# Altium PCB Power_Supply.PcbDoc
Units mil, origin at the board's own origin, x right, y up, seen from the top; angles counter-clockwise.
Board outline 6000 x 4000 mil, 2 copper layers (Top Layer, Bottom Layer); 16 components, 5 nets, 49 pads, 0 vias.
Unrouted connection lines stored in the file: 4.
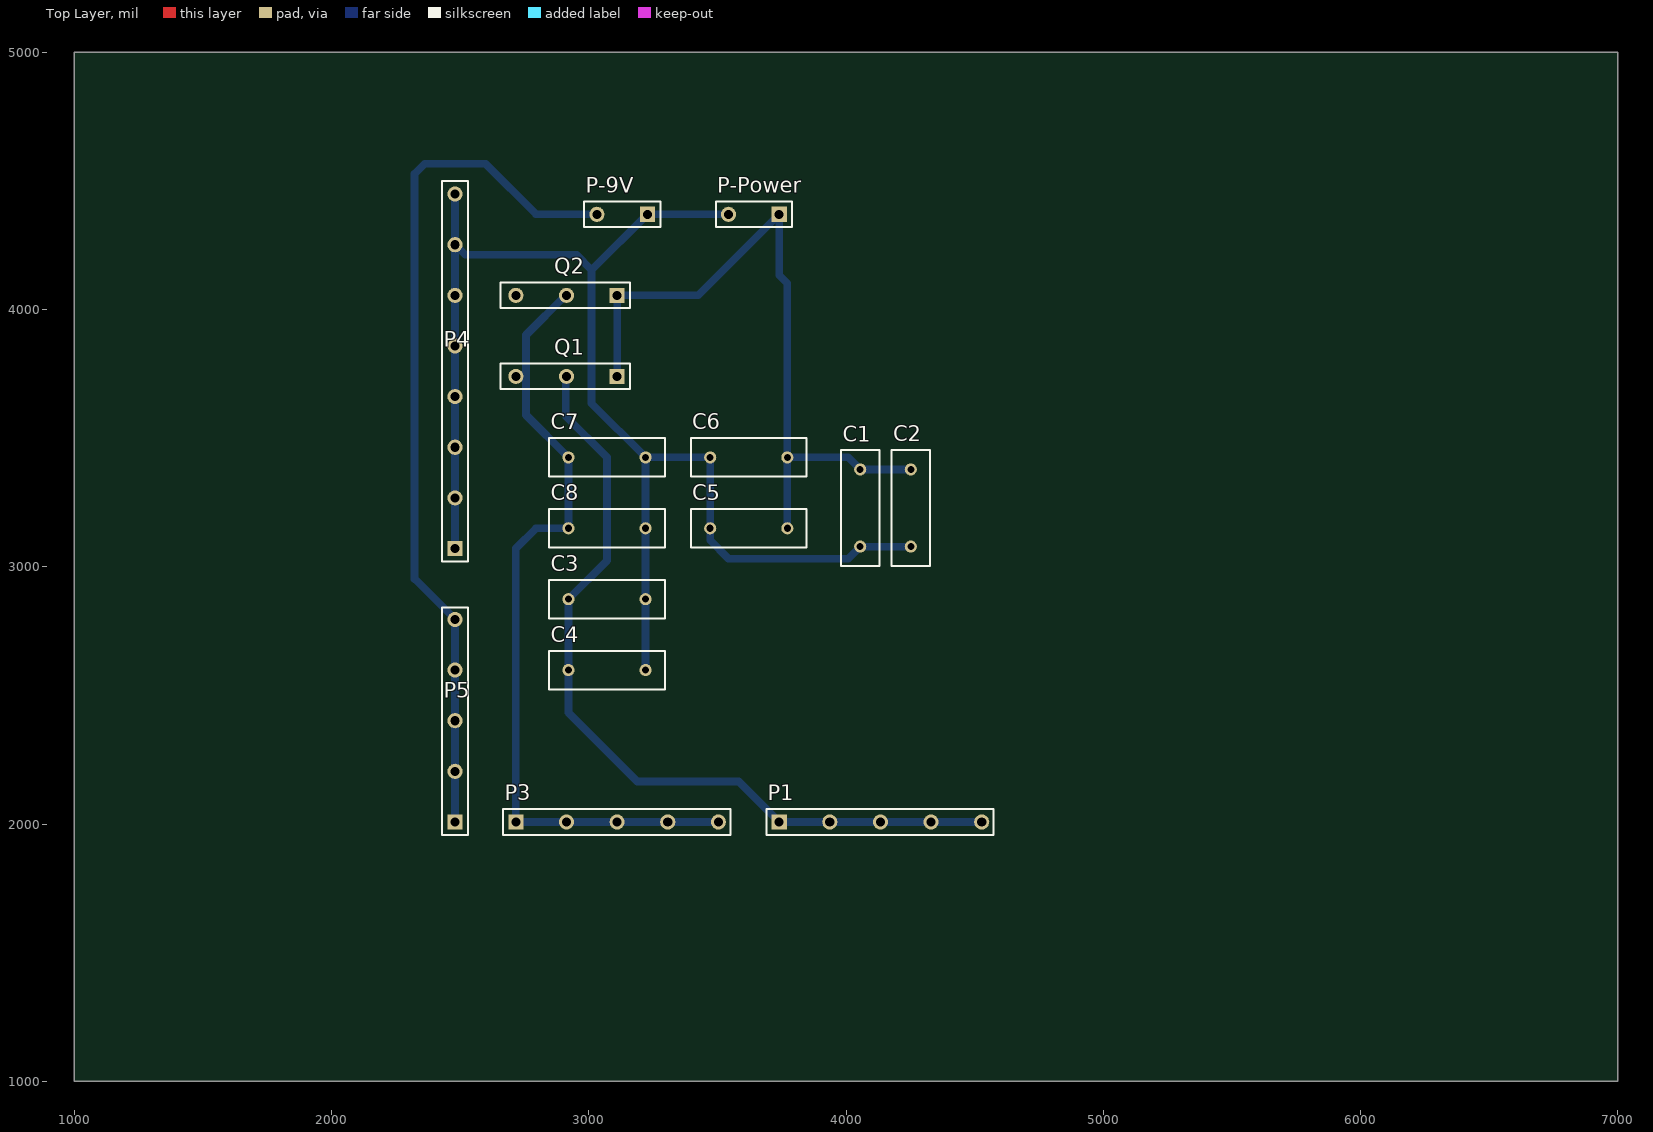
[diagram p0: Top Layer view]
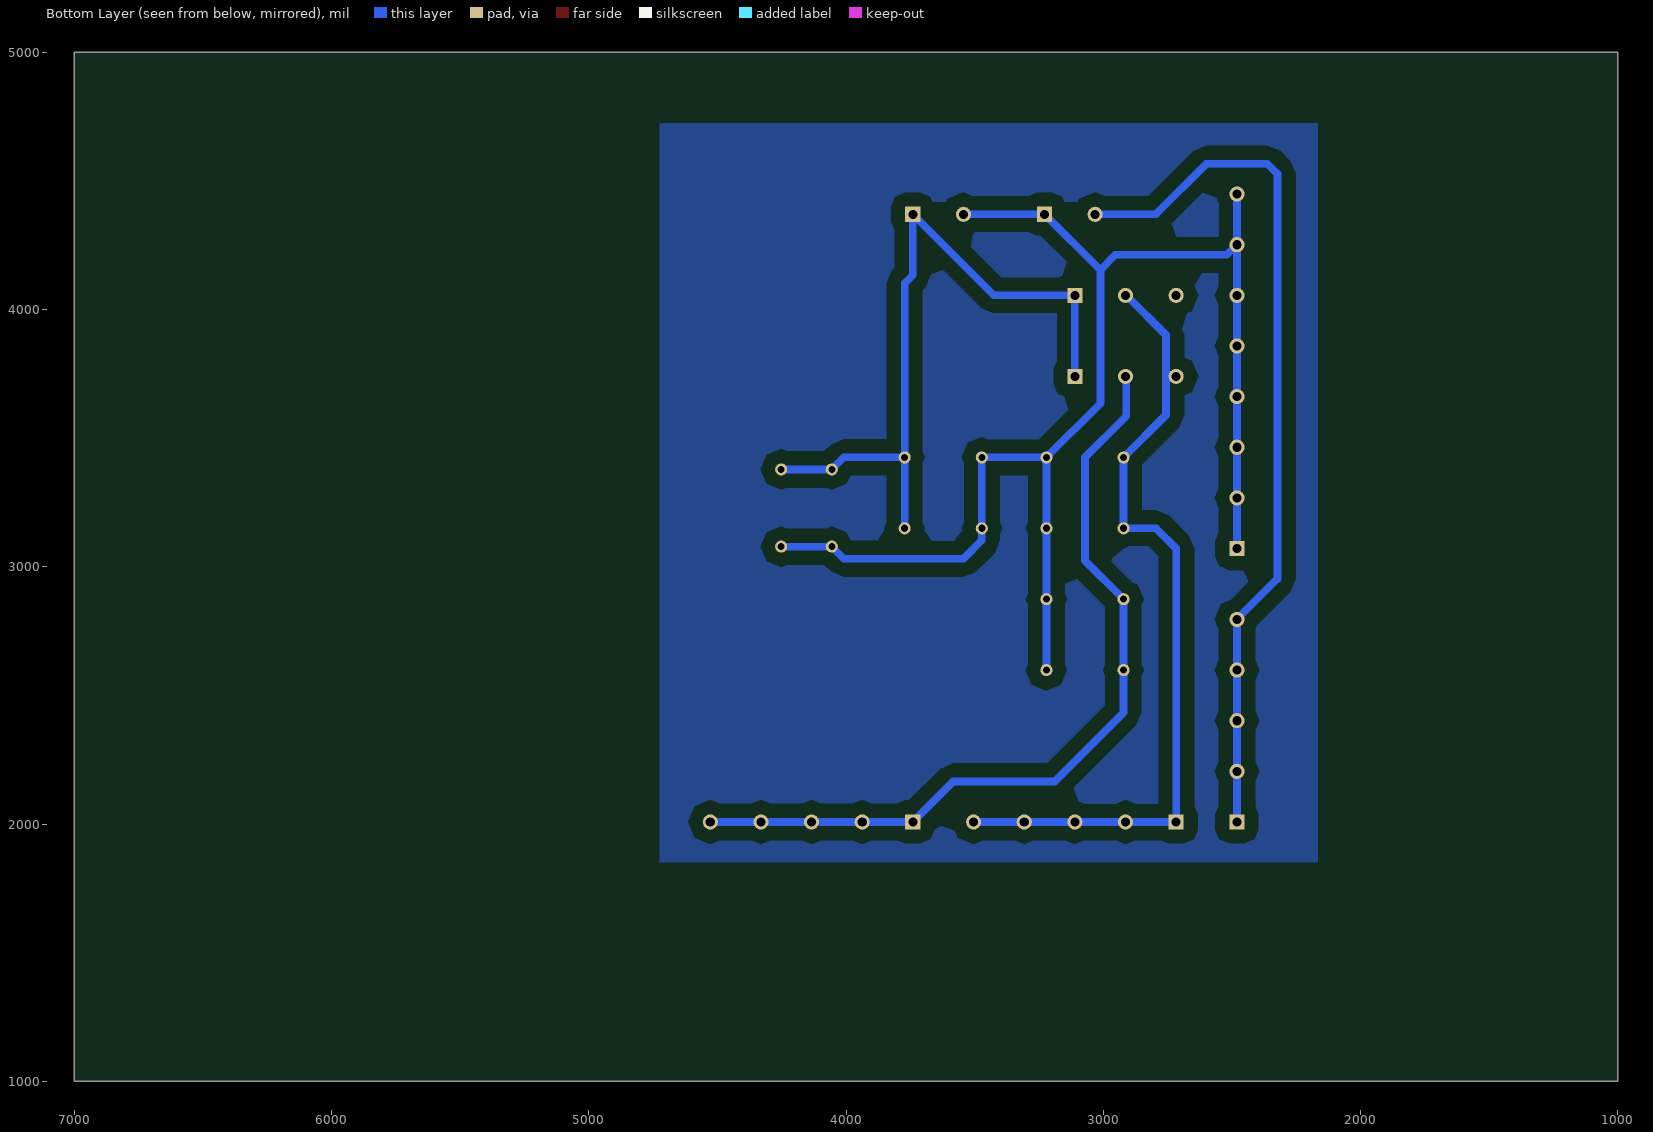
[diagram p1: Bottom Layer view, seen from below]

## Layer stack, top to bottom
Top Solder: solder mask 0.4, Solder Resist, Dk 3.5
Top Layer: signal copper 1.4
Dielectric 1: dielectric 12.6, FR-4, Dk 4.8
Bottom Layer: signal copper 1.4
Bottom Solder: solder mask 0.4, Solder Resist, Dk 3.5

## Board outline
1000,1000 7000,1000 7000,5000 1000,5000

## Design rules (kind name [scope] priority, off if disabled: settings)
Clearance [All] p1: gap=50 ignorepadtopadclearanceinfootprint=FALSE except(0: Arc-Hole Track-Hole SMDPad-Hole THPad-Hole Via-Hole Fill-Hole Poly-Hole Region-Hole Text-Hole)
PolygonConnect [All] p1: connectstyle=Relief reliefconductorwidth=10 reliefentries=4 polygonreliefangle="90 Angle" airgapwidth=10
RoomDefinition "Final project" [InComponentClass('Final project')] p1: confinementstyle=ConfineIn formatcopy=TRUE lockcomponents=FALSE outline 7045,1060 10090,1060 10090,1980 7045,1980
RoomDefinition "AT long bus (13.3 x 4.2 inches)" [InComponentClass('AT long bus (13.3 x 4.2 inches)')] p2: confinementstyle=ConfineIn formatcopy=TRUE lockcomponents=FALSE outline 0,0 2000,0 2000,1000 0,1000
RoutingVias [All] p1: holewidth=28 width=50 viastyle="Through Hole" minholewidth=28 minwidth=50 maxholewidth=28 maxwidth=50
SolderMaskExpansion [All] p1: expansion=4
Width [All] p1: maxlimit=40 minlimit=10 preferedwidth=30
30 further rules are at their usual default settings.

## Classes and differential pairs
component class "AT long bus (13.3 x 4.2 inches)": P?

## Components (designator, comment, footprint, x,y, rotation, side; value= is the part's Value field where it differs from the comment)
C1 "" RAD-0.3 4055.12,3228.35 r90 top value=100nF
C2 "" RAD-0.3 4251.97,3228.35 r270 top value=100nF
C3 "" RAD-0.3 3070.87,2874.02 r180 top value=100nF
C4 "" RAD-0.3 3070.87,2598.43 r180 top value=100nF
C5 "" RAD-0.3 3622.05,3149.61 r0 top value=100nF
C6 "" RAD-0.3 3622.05,3425.2 r0 top value=100nF
C7 "" RAD-0.3 3070.87,3425.2 r180 top value=100nF
C8 "" RAD-0.3 3070.87,3149.61 r180 top value=100nF
P1 "Header 5" HDR1X5 3740.16,2007.87 r0 top
P3 "Header 5" HDR1X5 2716.54,2007.87 r0 top
P4 "Header 8" HDR1X8 2480.32,3070.87 r90 top
P5 "Header 5" HDR1X5 2480.32,2007.87 r90 top
P-9V "Header 2" HDR1X2 3228.35,4370.08 r180 top
P-Power "Header 2" HDR1X2 3740.16,4370.08 r180 top
Q1 "LM7805CT/NOPB" HDR1X3 3110.24,3740.16 r180 top
Q2 "LM7809CT/NOPB" HDR1X3 3110.24,4055.12 r180 top

## Footprints (in the part's own frame and the unit in brackets; to place one, negate y for a bottom-side part, rotate by r counter-clockwise, add the part's x,y. Pads: shape width x height; smd on the part's side, far side on the other; paste and mask are expansions set on the pad)
HDR1X2 [mm] "Connector; Header; 2 Position"
  rect 1.5x1.5 hole 0.9: 1(0,0)
  round 1.5 hole 0.9: 2(5,0)
  silkscreen extent -1.27,-1.27 6.25,1.27
HDR1X3 [mm] "Connector; Header; 3 Position"
  rect 1.5x1.5 hole 0.9: 1(0,0)
  round 1.5 hole 0.9: 2(5,0) 3(10,0)
  silkscreen extent -1.27,-1.27 11.5,1.27
HDR1X5 [mm] "Connector; Header; 5 Position"
  rect 1.5x1.5 hole 0.9: 1(0,0)
  round 1.5 hole 0.9: 2(5,0) 3(10,0) 4(15,0) 5(20,0)
  silkscreen extent -1.27,-1.27 21.17,1.27
HDR1X8 [mm] "Connector; Header; 8 Position"
  rect 1.5x1.5 hole 0.9: 1(0,0)
  round 1.5 hole 0.9: 2(5,0) 3(10,0) 4(15,0) 5(20,0) 6(25,0) 7(30,0) 8(35,0)
  silkscreen extent -1.27,-1.27 36.3,1.27
RAD-0.3 [mm] "Radial Cap, Thru-Hole; 2 Leads; 0.3 in Pin Spacing"
  round 1.2 hole 0.7: 1(-3.81,0) 2(3.81,0)
  silkscreen extent -5.71,-1.91 5.71,1.91

## Part data
C1 C2 C3 C4 C5 C6 C7 C8: library part Cap, "Capacitor", LatestRevisionDate=17-Jul-2002, LatestRevisionNote="Re-released for DXP Platform.", PackageDescription="Radial Cap, Thru-Hole; 2 Leads; 0.3 in Pin Spacing", PackageReference=RAD-0.3, Published=8-Jun-2000, Publisher="Altium Limited"
P1 P3 P5: "Header, 5-Pin", LatestRevisionDate=17-Jul-2002, LatestRevisionNote="Re-released for DXP Platform.", Publisher="Altium Limited"
P4: "Header, 8-Pin", LatestRevisionDate=17-Jul-2002, LatestRevisionNote="Re-released for DXP Platform.", Publisher="Altium Limited"
P-9V P-Power: "Header, 2-Pin", LatestRevisionDate=17-Jul-2002, LatestRevisionNote="Re-released for DXP Platform.", Publisher="Altium Limited"
Q1: Package="TO-220 ON Semiconductor", Availability=Unavailable, MF="ON Semiconductor", MP=LM7805CT, Price=None, SnapEDA_Link=https://www.snapeda.com/parts/LM7805CT/ON%20Semiconductor/view-part/?ref=snap
Q2: library part LM7805CT/NOPB, Package="TO-220 ON Semiconductor", Availability=Unavailable, MF="ON Semiconductor", MP=LM7805CT, Price=None, SnapEDA_Link=https://www.snapeda.com/parts/LM7805CT/ON%20Semiconductor/view-part/?ref=snap

## Nets (pads, with @x,y where several pads share a name; then routed paths per layer and width w, separated by ;. In a path a pad name is that pad's centre, name@x,y a point inside that pad or via, vN(x,y) a via of type N, cw(c..) or ccw(c..) an arc to the next point about the centre after c; other vN are vias at no path point)
NetC1_1: C1.1 C2.2 C3.1 C4.1 C5.1 C6.1 C7.1 C8.1 P4.1 P4.2 P4.3 P4.4 P4.5 P4.6 P4.7 P4.8 P-9V.1 P-Power.2 Q1.2 Q2.2 | length 5617.8
  Bottom Layer w30: P4.1 P4.2 P4.3 P4.4 P4.5 P4.6 P4.7 ; P4.8 P4.7 ; C4.1 C3.1 C8.1 C7.1 ; P-Power.2 P-9V.1 3010.24,4151.97 ; C2.2 C1.1 4008.27,3031.5 3543.31,3031.5 3472.05,3102.76 C5.1 C6.1 C7.1 ; P4.7 2519.69,4212.6 2952.76,4212.6 3010.24,4155.12 3010.24,4151.97 ; 3010.24,4151.97 3010.24,3635.83 C7.1
NetC1_2: C1.2 C2.1 C5.2 C6.2 P-Power.1 Q1.1 Q2.1 | length 2808.4
  Bottom Layer w30: Q1.1 Q2.1 3425.2,4055.12 P-Power.1 3740.16,4133.86 3772.05,4101.97 C6.2 ; C5.2 C6.2 ; C2.1 C1.2 4008.27,3425.2 C6.2
NetC3_2: C3.2 C4.2 P1.1 P1.2 P1.3 P1.4 P1.5 Q1.3 | length 3218.3
  Bottom Layer w30: 2910.24,3740.16 2910.24,3585.83 3070.87,3425.2 3070.87,3024.02 C3.2 C4.2 2920.87,2433.46 3188.98,2165.35 3582.68,2165.35 P1.1 P1.2 P1.3 P1.4 P1.5
NetC7_2: C7.2 C8.2 P3.1 P3.2 P3.3 P3.4 P3.5 Q2.3 | length 3125.1
  Bottom Layer w30: 2910.24,4055.12 2755.91,3900.79 2755.91,3590.16 C7.2 C8.2 2795.28,3149.61 2716.54,3070.87 P3.1 P3.2 P3.3 P3.4 P3.5
NetP5_1: P5.1 P5.2 P5.3 P5.4 P5.5 P-9V.2 | length 3391.4
  Bottom Layer w30: P5.1 P5.2 P5.3 P5.4 P5.5 2322.83,2952.76 2322.83,4527.56 2362.2,4566.93 2598.43,4566.93 2795.28,4370.08 P-9V.2

## Polygon pours and split planes (outlines as drawn)
no net on Bottom Layer "Bottom Layer-No Net 1" (solid, pour order 4): 2165.35,4724.41 4724.41,4724.41 4724.41,1850.39 2165.35,1850.39